# Altium PCB RF-UNIT-QRP-7W.PcbDoc (part 3 of 4)
Units mm, origin at the board's own origin, x right, y up, seen from the top; angles counter-clockwise.
Board outline 187 x 77 mm, 2 copper layers (Top Layer, Top, Bottom Layer, Bottom); 244 components, 167 nets, 747 pads, 3684 vias.
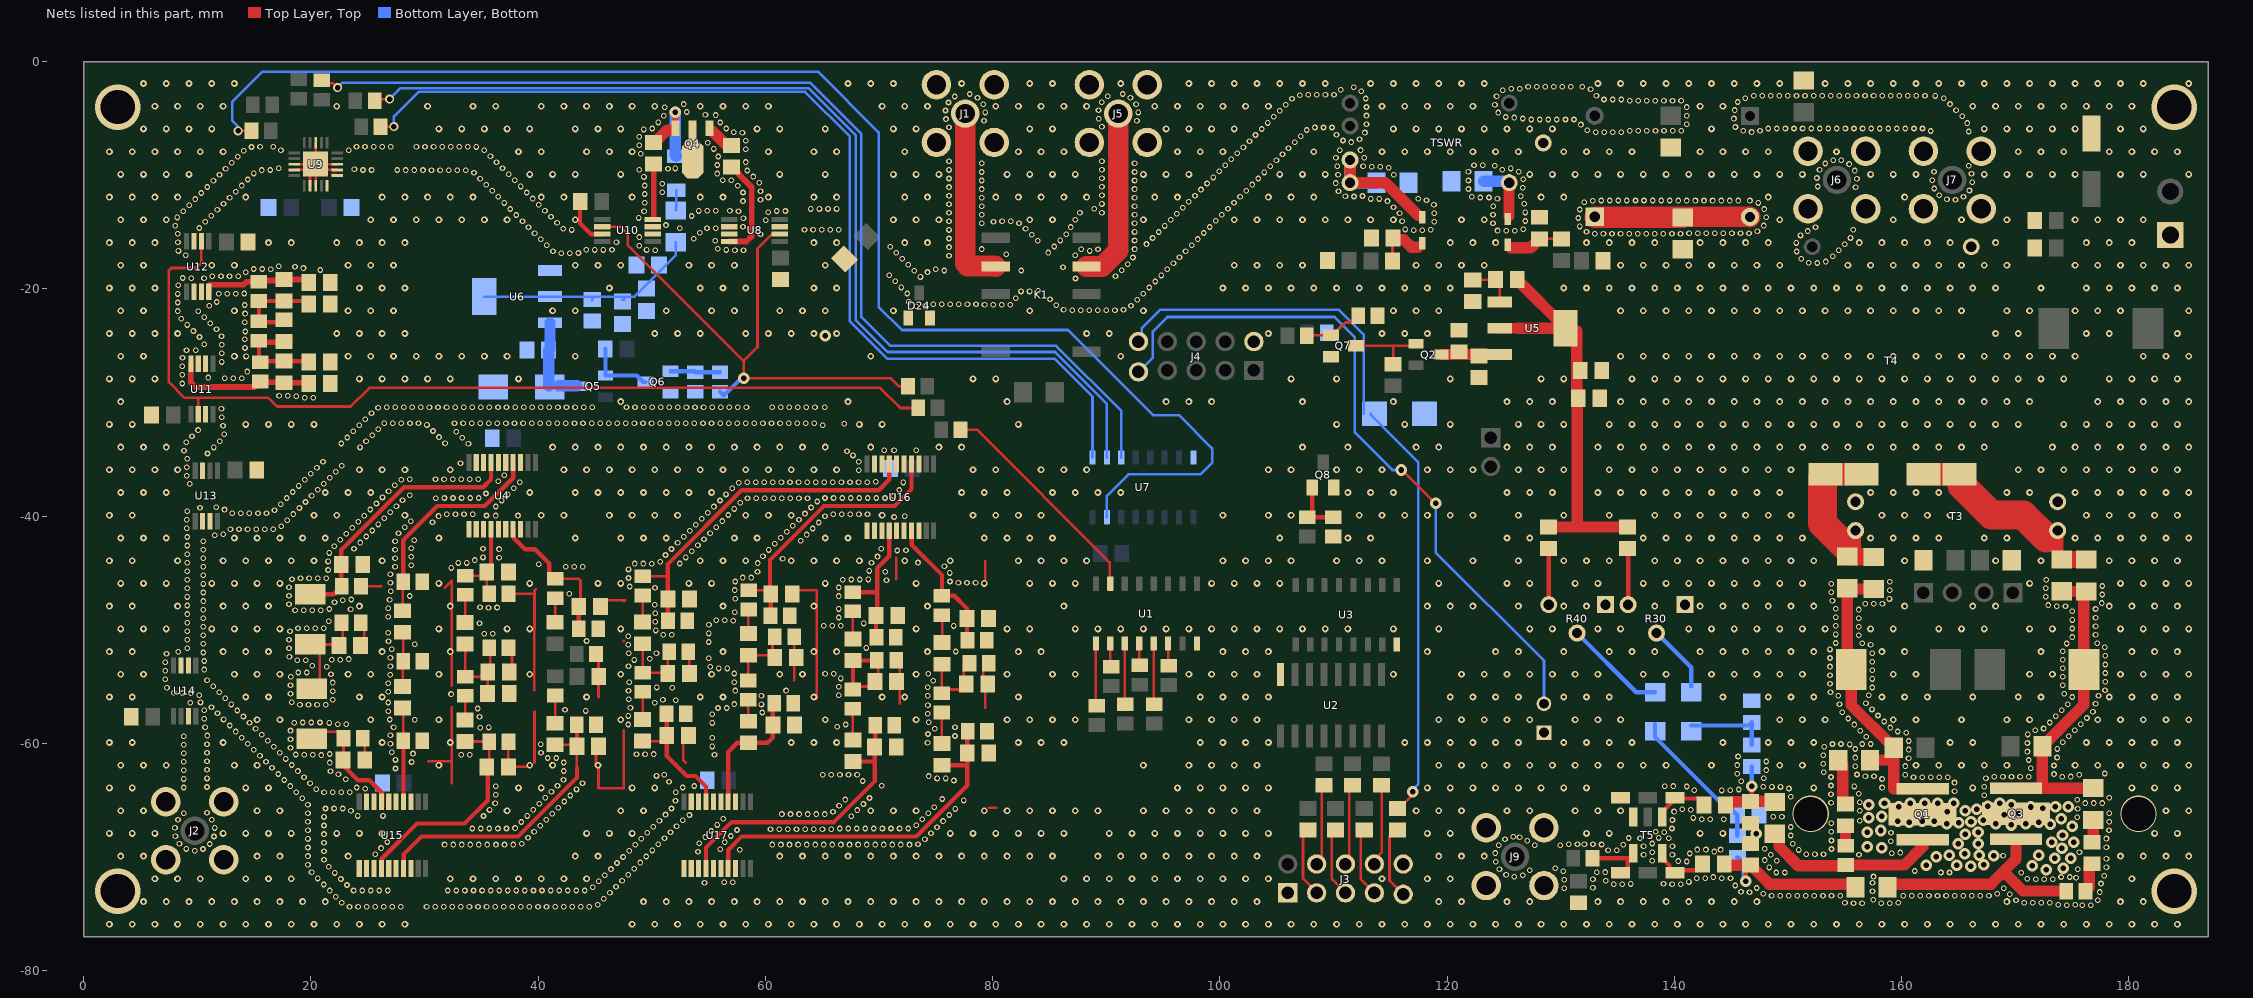
[diagram p3: the nets of this part, all layers, seen from the top]

## Via types
v1: diameter 0.5, hole 0.3, Top Layer, Top to Bottom Layer, Bottom, tented both sides, 1961 vias
v2: diameter 0.6, hole 0.3, Top Layer, Top to Bottom Layer, Bottom, tented both sides, 1584 vias
v3: diameter 1.016, hole 0.486, Top Layer, Top to Bottom Layer, Bottom, tented both sides, 127 vias
v4: diameter 0.8, hole 0.486, Top Layer, Top to Bottom Layer, Bottom, tented both sides, 6 vias
v5: diameter 4, hole 3, Top Layer, Top to Bottom Layer, Bottom, 4 vias
v6: diameter 3.2, hole 3, Top Layer, Top to Bottom Layer, Bottom, 2 vias

## Nets (pads, with @x,y where several pads share a name; then routed paths per layer and width w, separated by ;. In a path a pad name is that pad's centre, name@x,y a point inside that pad or via, vN(x,y) a via of type N, cw(c..) or ccw(c..) an arc to the next point about the centre after c; other vN are vias at no path point) (continued)
GND: (continued)
  other v2: 2.271,-75.923 4.271,-75.923 6.271,-75.923 8.271,-75.923 10.271,-75.923 12.271,-75.923 14.271,-75.923 16.271,-75.923 18.271,-75.923 20.271,-75.923 22.271,-75.923 24.271,-75.923 26.271,-75.923 28.271,-75.923 48.271,-75.923 50.271,-75.923 52.271,-75.923 54.271,-75.923 56.271,-75.923 58.271,-75.923 60.271,-75.923 62.271,-75.923 64.271,-75.923 66.271,-75.923 68.271,-75.923 70.271,-75.923 72.271,-75.923 74.271,-75.923 76.271,-75.923 78.271,-75.923 80.271,-75.923 82.271,-75.923 84.271,-75.923 86.271,-75.923 88.271,-75.923 90.271,-75.923 92.271,-75.923 94.271,-75.923 96.271,-75.923 98.271,-75.923 100.271,-75.923 102.271,-75.923 104.271,-75.923 106.271,-75.923 108.271,-75.923 110.271,-75.923 112.271,-75.923 114.271,-75.923 116.271,-75.923 118.271,-75.923 120.271,-75.923 122.271,-75.923 124.271,-75.923 126.271,-75.923 128.271,-75.923 130.271,-75.923 132.271,-75.923 134.271,-75.923 136.271,-75.923 138.271,-75.923 140.271,-75.923 142.271,-75.923 144.271,-75.923 146.271,-75.923 148.271,-75.923 150.271,-75.923 152.271,-75.923 154.271,-75.923 156.271,-75.923 158.271,-75.923 160.271,-75.923 162.271,-75.923 164.271,-75.923 166.271,-75.923 168.271,-75.923 170.271,-75.923 172.271,-75.923 174.271,-75.923 176.271,-75.923 178.271,-75.923 180.271,-75.923 182.271,-75.923 184.271,-75.923 5.271,-73.923 7.271,-73.923 9.271,-73.923 11.271,-73.923 13.271,-73.923 15.271,-73.923 17.271,-73.923 19.271,-73.923 21.271,-73.923 49.271,-73.923 51.271,-73.923 53.271,-73.923 55.271,-73.923 57.271,-73.923 59.271,-73.923 61.271,-73.923 63.271,-73.923 65.271,-73.923 67.271,-73.923 69.271,-73.923 71.271,-73.923 73.271,-73.923 75.271,-73.923 77.271,-73.923 79.271,-73.923 81.271,-73.923 83.271,-73.923 85.271,-73.923 87.271,-73.923 89.271,-73.923 91.271,-73.923 93.271,-73.923 95.271,-73.923 97.271,-73.923 99.271,-73.923 101.271,-73.923 103.271,-73.923 119.271,-73.923 121.271,-73.923 125.271,-73.923 127.271,-73.923 133.271,-73.923 135.271,-73.923 137.271,-73.923 139.271,-73.923 141.271,-73.923 143.271,-73.923 145.271,-73.923 147.271,-73.923 169.271,-73.923 179.271,-73.923 181.271,-73.923 6.271,-71.923 8.271,-71.923 10.271,-71.923 14.271,-71.923 16.271,-71.923 18.271,-71.923 32.271,-71.923 34.271,-71.923 36.271,-71.923 38.271,-71.923 40.271,-71.923 42.271,-71.923 44.271,-71.923 86.271,-71.923 88.271,-71.923 90.271,-71.923 92.271,-71.923 94.271,-71.923 96.271,-71.923 98.271,-71.923 100.271,-71.923 102.271,-71.923 104.271,-71.923 114.271,-71.923 118.271,-71.923 120.271,-71.923 180.271,-71.923 3.271,-69.923 5.271,-69.923 15.271,-69.923 17.271,-69.923 23.271,-69.923 43.271,-69.923 45.271,-69.923 61.271,-69.923 63.271,-69.923 65.271,-69.923 67.271,-69.923 69.271,-69.923 71.271,-69.923 73.271,-69.923 75.271,-69.923 77.271,-69.923 79.271,-69.923 81.271,-69.923 83.271,-69.923 85.271,-69.923 89.271,-69.923 91.271,-69.923 93.271,-69.923 95.271,-69.923 97.271,-69.923 99.271,-69.923 101.271,-69.923 103.271,-69.923 119.271,-69.923 121.271,-69.923 123.271,-69.923 179.271,-69.923 181.271,-69.923 183.271,-69.923 185.271,-69.923 2.271,-67.923 4.271,-67.923 6.271,-67.923 12.271,-67.923 14.271,-67.923 16.271,-67.923 18.271,-67.923 22.271,-67.923 24.271,-67.923 26.271,-67.923 44.271,-67.923 46.271,-67.923 48.271,-67.923 76.271,-67.923 78.271,-67.923 80.271,-67.923 82.271,-67.923 84.271,-67.923 86.271,-67.923 90.271,-67.923 92.271,-67.923 94.271,-67.923 96.271,-67.923 98.271,-67.923 100.271,-67.923 102.271,-67.923 104.271,-67.923 118.271,-67.923 120.271,-67.923 132.271,-67.923 134.271,-67.923 142.271,-67.923 144.271,-67.923 182.271,-67.923 184.271,-67.923 3.271,-65.923 5.271,-65.923 15.271,-65.923 17.271,-65.923 37.271,-65.923 47.271,-65.923 49.271,-65.923 69.271,-65.923 71.271,-65.923 73.271,-65.923 79.271,-65.923 81.271,-65.923 83.271,-65.923 85.271,-65.923 87.271,-65.923 89.271,-65.923 93.271,-65.923 95.271,-65.923 97.271,-65.923 99.271,-65.923 101.271,-65.923 103.271,-65.923 117.271,-65.923 119.271,-65.923 121.271,-65.923 125.271,-65.923 127.271,-65.923 131.271,-65.923 133.271,-65.923 135.271,-65.923 183.271,-65.923 185.271,-65.923 2.271,-63.923 4.271,-63.923 14.271,-63.923 16.271,-63.923 38.271,-63.923 40.271,-63.923 48.271,-63.923 50.271,-63.923 96.271,-63.923 98.271,-63.923 100.271,-63.923 102.271,-63.923 104.271,-63.923 118.271,-63.923 120.271,-63.923 122.271,-63.923 124.271,-63.923 126.271,-63.923 128.271,-63.923 130.271,-63.923 132.271,-63.923 152.271,-63.923 166.271,-63.923 180.271,-63.923 182.271,-63.923 184.271,-63.923 3.271,-61.923 5.271,-61.923 7.271,-61.923 13.271,-61.923 15.271,-61.923 31.271,-61.923 39.271,-61.923 41.271,-61.923 45.271,-61.923 93.271,-61.923 97.271,-61.923 99.271,-61.923 101.271,-61.923 103.271,-61.923 119.271,-61.923 121.271,-61.923 123.271,-61.923 125.271,-61.923 127.271,-61.923 129.271,-61.923 131.271,-61.923 133.271,-61.923 135.271,-61.923 137.271,-61.923 139.271,-61.923 143.271,-61.923 149.271,-61.923 151.271,-61.923 161.271,-61.923 163.271,-61.923 165.271,-61.923 167.271,-61.923 169.271,-61.923 175.271,-61.923 177.271,-61.923 179.271,-61.923 181.271,-61.923 183.271,-61.923 185.271,-61.923 2.271,-59.923 4.271,-59.923 12.271,-59.923 26.271,-59.923 32.271,-59.923 62.271,-59.923 64.271,-59.923 66.271,-59.923 82.271,-59.923 84.271,-59.923 86.271,-59.923 98.271,-59.923 100.271,-59.923 102.271,-59.923 104.271,-59.923 116.271,-59.923 118.271,-59.923 120.271,-59.923 122.271,-59.923 124.271,-59.923 126.271,-59.923 130.271,-59.923 132.271,-59.923 134.271,-59.923 136.271,-59.923 144.271,-59.923 148.271,-59.923 150.271,-59.923 152.271,-59.923 164.271,-59.923 166.271,-59.923 176.271,-59.923 178.271,-59.923 180.271,-59.923 182.271,-59.923 184.271,-59.923 15.271,-57.923 17.271,-57.923 25.271,-57.923 31.271,-57.923 47.271,-57.923 65.271,-57.923 73.271,-57.923 81.271,-57.923 83.271,-57.923 85.271,-57.923 87.271,-57.923 97.271,-57.923 99.271,-57.923 101.271,-57.923 103.271,-57.923 119.271,-57.923 121.271,-57.923 123.271,-57.923 125.271,-57.923 127.271,-57.923 131.271,-57.923 133.271,-57.923 135.271,-57.923 149.271,-57.923 151.271,-57.923 153.271,-57.923 159.271,-57.923 161.271,-57.923 165.271,-57.923 169.271,-57.923 171.271,-57.923 177.271,-57.923 179.271,-57.923 181.271,-57.923 183.271,-57.923 185.271,-57.923 2.271,-55.923 4.271,-55.923 14.271,-55.923 16.271,-55.923 24.271,-55.923 26.271,-55.923 44.271,-55.923 54.271,-55.923 56.271,-55.923 64.271,-55.923 70.271,-55.923 72.271,-55.923 82.271,-55.923 98.271,-55.923 100.271,-55.923 102.271,-55.923 104.271,-55.923 120.271,-55.923 122.271,-55.923 124.271,-55.923 126.271,-55.923 130.271,-55.923 132.271,-55.923 134.271,-55.923 144.271,-55.923 148.271,-55.923 150.271,-55.923 152.271,-55.923 158.271,-55.923 160.271,-55.923 162.271,-55.923 166.271,-55.923 170.271,-55.923 172.271,-55.923 178.271,-55.923 180.271,-55.923 182.271,-55.923 184.271,-55.923 3.271,-53.923 5.271,-53.923 13.271,-53.923 15.271,-53.923 17.271,-53.923 23.271,-53.923 25.271,-53.923 31.271,-53.923 39.271,-53.923 47.271,-53.923 55.271,-53.923 61.271,-53.923 63.271,-53.923 73.271,-53.923 81.271,-53.923 85.271,-53.923 87.271,-53.923 97.271,-53.923 99.271,-53.923 101.271,-53.923 103.271,-53.923 115.271,-53.923 121.271,-53.923 123.271,-53.923 125.271,-53.923 127.271,-53.923 129.271,-53.923 131.271,-53.923 133.271,-53.923 137.271,-53.923 139.271,-53.923 143.271,-53.923 145.271,-53.923 147.271,-53.923 149.271,-53.923 151.271,-53.923 159.271,-53.923 161.271,-53.923 171.271,-53.923 173.271,-53.923 179.271,-53.923 181.271,-53.923 183.271,-53.923 185.271,-53.923 2.271,-51.923 4.271,-51.923 12.271,-51.923 14.271,-51.923 16.271,-51.923 26.271,-51.923 32.271,-51.923 56.271,-51.923 64.271,-51.923 66.271,-51.923 74.271,-51.923 82.271,-51.923 84.271,-51.923 100.271,-51.923 102.271,-51.923 104.271,-51.923 118.271,-51.923 124.271,-51.923 126.271,-51.923 130.271,-51.923 134.271,-51.923 136.271,-51.923 138.271,-51.923 142.271,-51.923 144.271,-51.923 146.271,-51.923 148.271,-51.923 150.271,-51.923 152.271,-51.923 158.271,-51.923 160.271,-51.923 172.271,-51.923 180.271,-51.923 182.271,-51.923 184.271,-51.923 3.271,-49.923 5.271,-49.923 7.271,-49.923 11.271,-49.923 13.271,-49.923 15.271,-49.923 17.271,-49.923 31.271,-49.923 37.271,-49.923 39.271,-49.923 47.271,-49.923 73.271,-49.923 81.271,-49.923 83.271,-49.923 87.271,-49.923 89.271,-49.923 91.271,-49.923 93.271,-49.923 95.271,-49.923 97.271,-49.923 99.271,-49.923 101.271,-49.923 103.271,-49.923 105.271,-49.923 107.271,-49.923 109.271,-49.923 111.271,-49.923 115.271,-49.923 119.271,-49.923 127.271,-49.923 129.271,-49.923 133.271,-49.923 135.271,-49.923 141.271,-49.923 143.271,-49.923 145.271,-49.923 147.271,-49.923 149.271,-49.923 151.271,-49.923 153.271,-49.923 157.271,-49.923 159.271,-49.923 163.271,-49.923 165.271,-49.923 167.271,-49.923 171.271,-49.923 173.271,-49.923 179.271,-49.923 181.271,-49.923 183.271,-49.923 185.271,-49.923 2.271,-47.923 4.271,-47.923 8.271,-47.923 12.271,-47.923 14.271,-47.923 16.271,-47.923 24.271,-47.923 32.271,-47.923 56.271,-47.923 64.271,-47.923 74.271,-47.923 86.271,-47.923 118.271,-47.923 120.271,-47.923 122.271,-47.923 126.271,-47.923 130.271,-47.923 132.271,-47.923 138.271,-47.923 142.271,-47.923 144.271,-47.923 146.271,-47.923 148.271,-47.923 150.271,-47.923 152.271,-47.923 160.271,-47.923 166.271,-47.923 168.271,-47.923 178.271,-47.923 180.271,-47.923 182.271,-47.923 184.271,-47.923 3.271,-45.923 5.271,-45.923 7.271,-45.923 11.271,-45.923 13.271,-45.923 15.271,-45.923 17.271,-45.923 31.271,-45.923 39.271,-45.923 45.271,-45.923 47.271,-45.923 53.271,-45.923 55.271,-45.923 65.271,-45.923 73.271,-45.923 79.271,-45.923 83.271,-45.923 85.271,-45.923 87.271,-45.923 99.271,-45.923 101.271,-45.923 103.271,-45.923 105.271,-45.923 119.271,-45.923 125.271,-45.923 127.271,-45.923 131.271,-45.923 133.271,-45.923 137.271,-45.923 139.271,-45.923 141.271,-45.923 143.271,-45.923 145.271,-45.923 147.271,-45.923 149.271,-45.923 151.271,-45.923 171.271,-45.923 179.271,-45.923 181.271,-45.923 183.271,-45.923 185.271,-45.923 2.271,-43.923 4.271,-43.923 8.271,-43.923 12.271,-43.923 14.271,-43.923 16.271,-43.923 18.271,-43.923 20.271,-43.923 26.271,-43.923 54.271,-43.923 56.271,-43.923 58.271,-43.923 62.271,-43.923 64.271,-43.923 66.271,-43.923 68.271,-43.923 72.271,-43.923 76.271,-43.923 82.271,-43.923 84.271,-43.923 86.271,-43.923 88.271,-43.923 100.271,-43.923 102.271,-43.923 104.271,-43.923 106.271,-43.923 110.271,-43.923 112.271,-43.923 114.271,-43.923 118.271,-43.923 122.271,-43.923 126.271,-43.923 130.271,-43.923 132.271,-43.923 134.271,-43.923 138.271,-43.923 140.271,-43.923 142.271,-43.923 144.271,-43.923 146.271,-43.923 148.271,-43.923 150.271,-43.923 152.271,-43.923 160.271,-43.923 168.271,-43.923 172.271,-43.923 178.271,-43.923 180.271,-43.923 182.271,-43.923 184.271,-43.923 3.271,-41.923 5.271,-41.923 7.271,-41.923 13.271,-41.923 15.271,-41.923 17.271,-41.923 19.271,-41.923 21.271,-41.923 31.271,-41.923 43.271,-41.923 47.271,-41.923 49.271,-41.923 51.271,-41.923 57.271,-41.923 59.271,-41.923 65.271,-41.923 67.271,-41.923 79.271,-41.923 81.271,-41.923 83.271,-41.923 85.271,-41.923 105.271,-41.923 111.271,-41.923 113.271,-41.923 125.271,-41.923 127.271,-41.923 137.271,-41.923 139.271,-41.923 141.271,-41.923 143.271,-41.923 145.271,-41.923 147.271,-41.923 149.271,-41.923 151.271,-41.923 157.271,-41.923 159.271,-41.923 161.271,-41.923 163.271,-41.923 167.271,-41.923 169.271,-41.923 175.271,-41.923 177.271,-41.923 179.271,-41.923 181.271,-41.923 183.271,-41.923 185.271,-41.923 2.271,-39.923 4.271,-39.923 20.271,-39.923 22.271,-39.923 28.271,-39.923 40.271,-39.923 42.271,-39.923 46.271,-39.923 48.271,-39.923 50.271,-39.923 52.271,-39.923 58.271,-39.923 60.271,-39.923 62.271,-39.923 70.271,-39.923 78.271,-39.923 80.271,-39.923 82.271,-39.923 84.271,-39.923 100.271,-39.923 104.271,-39.923 106.271,-39.923 112.271,-39.923 114.271,-39.923 116.271,-39.923 118.271,-39.923 120.271,-39.923 122.271,-39.923 126.271,-39.923 130.271,-39.923 134.271,-39.923 138.271,-39.923 140.271,-39.923 142.271,-39.923 144.271,-39.923 146.271,-39.923 148.271,-39.923 150.271,-39.923 158.271,-39.923 160.271,-39.923 162.271,-39.923 164.271,-39.923 176.271,-39.923 178.271,-39.923 180.271,-39.923 182.271,-39.923 184.271,-39.923 3.271,-37.923 5.271,-37.923 7.271,-37.923 21.271,-37.923 23.271,-37.923 25.271,-37.923 39.271,-37.923 43.271,-37.923 45.271,-37.923 47.271,-37.923 49.271,-37.923 51.271,-37.923 53.271,-37.923 55.271,-37.923 77.271,-37.923 79.271,-37.923 81.271,-37.923 85.271,-37.923 87.271,-37.923 89.271,-37.923 91.271,-37.923 111.271,-37.923 113.271,-37.923 115.271,-37.923 125.271,-37.923 127.271,-37.923 129.271,-37.923 133.271,-37.923 135.271,-37.923 137.271,-37.923 139.271,-37.923 141.271,-37.923 143.271,-37.923 145.271,-37.923 147.271,-37.923 149.271,-37.923 157.271,-37.923 159.271,-37.923 161.271,-37.923 163.271,-37.923 169.271,-37.923 171.271,-37.923 175.271,-37.923 177.271,-37.923 179.271,-37.923 181.271,-37.923 183.271,-37.923 185.271,-37.923 2.271,-35.923 4.271,-35.923 6.271,-35.923 8.271,-35.923 24.271,-35.923 26.271,-35.923 28.271,-35.923 32.271,-35.923 42.271,-35.923 44.271,-35.923 46.271,-35.923 48.271,-35.923 50.271,-35.923 52.271,-35.923 54.271,-35.923 56.271,-35.923 58.271,-35.923 60.271,-35.923 62.271,-35.923 64.271,-35.923 66.271,-35.923 78.271,-35.923 80.271,-35.923 84.271,-35.923 86.271,-35.923 88.271,-35.923 104.271,-35.923 106.271,-35.923 110.271,-35.923 112.271,-35.923 114.271,-35.923 118.271,-35.923 120.271,-35.923 122.271,-35.923 126.271,-35.923 128.271,-35.923 130.271,-35.923 134.271,-35.923 136.271,-35.923 138.271,-35.923 140.271,-35.923 142.271,-35.923 144.271,-35.923 146.271,-35.923 148.271,-35.923 150.271,-35.923 170.271,-35.923 172.271,-35.923 174.271,-35.923 176.271,-35.923 178.271,-35.923 180.271,-35.923 182.271,-35.923 184.271,-35.923 3.271,-33.923 5.271,-33.923 7.271,-33.923 41.271,-33.923 43.271,-33.923 45.271,-33.923 47.271,-33.923 49.271,-33.923 51.271,-33.923 53.271,-33.923 55.271,-33.923 57.271,-33.923 59.271,-33.923 61.271,-33.923 63.271,-33.923 65.271,-33.923 69.271,-33.923 75.271,-33.923 77.271,-33.923 107.271,-33.923 111.271,-33.923 117.271,-33.923 119.271,-33.923 125.271,-33.923 127.271,-33.923 129.271,-33.923 133.271,-33.923 135.271,-33.923 137.271,-33.923 139.271,-33.923 141.271,-33.923 143.271,-33.923 145.271,-33.923 147.271,-33.923 149.271,-33.923 151.271,-33.923 153.271,-33.923 155.271,-33.923 157.271,-33.923 159.271,-33.923 161.271,-33.923 163.271,-33.923 165.271,-33.923 167.271,-33.923 173.271,-33.923 175.271,-33.923 177.271,-33.923 179.271,-33.923 181.271,-33.923 183.271,-33.923 185.271,-33.923 2.271,-31.923 4.271,-31.923 14.271,-31.923 16.271,-31.923 18.271,-31.923 20.271,-31.923 68.271,-31.923 70.271,-31.923 82.271,-31.923 110.271,-31.923 116.271,-31.923 120.271,-31.923 126.271,-31.923 128.271,-31.923 130.271,-31.923 134.271,-31.923 136.271,-31.923 138.271,-31.923 140.271,-31.923 142.271,-31.923 144.271,-31.923 146.271,-31.923 148.271,-31.923 150.271,-31.923 152.271,-31.923 154.271,-31.923 156.271,-31.923 158.271,-31.923 160.271,-31.923 162.271,-31.923 164.271,-31.923 166.271,-31.923 168.271,-31.923 170.271,-31.923 174.271,-31.923 176.271,-31.923 178.271,-31.923 180.271,-31.923 182.271,-31.923 184.271,-31.923 3.271,-29.923 47.271,-29.923 67.271,-29.923 81.271,-29.923 95.271,-29.923 97.271,-29.923 99.271,-29.923 107.271,-29.923 115.271,-29.923 125.271,-29.923 127.271,-29.923 129.271,-29.923 135.271,-29.923 137.271,-29.923 139.271,-29.923 141.271,-29.923 143.271,-29.923 145.271,-29.923 147.271,-29.923 149.271,-29.923 151.271,-29.923 153.271,-29.923 155.271,-29.923 157.271,-29.923 159.271,-29.923 161.271,-29.923 163.271,-29.923 165.271,-29.923 167.271,-29.923 169.271,-29.923 171.271,-29.923 177.271,-29.923 179.271,-29.923 181.271,-29.923 183.271,-29.923 185.271,-29.923 2.271,-27.923 4.271,-27.923 6.271,-27.923 24.271,-27.923 26.271,-27.923 28.271,-27.923 30.271,-27.923 32.271,-27.923 38.271,-27.923 78.271,-27.923 80.271,-27.923 106.271,-27.923 110.271,-27.923 120.271,-27.923 128.271,-27.923 130.271,-27.923 136.271,-27.923 138.271,-27.923 140.271,-27.923 142.271,-27.923 144.271,-27.923 146.271,-27.923 148.271,-27.923 150.271,-27.923 152.271,-27.923 154.271,-27.923 156.271,-27.923 158.271,-27.923 160.271,-27.923 162.271,-27.923 164.271,-27.923 166.271,-27.923 168.271,-27.923 170.271,-27.923 172.271,-27.923 174.271,-27.923 178.271,-27.923 180.271,-27.923 182.271,-27.923 184.271,-27.923 3.271,-25.923 5.271,-25.923 13.271,-25.923 23.271,-25.923 25.271,-25.923 27.271,-25.923 29.271,-25.923 31.271,-25.923 33.271,-25.923 35.271,-25.923 37.271,-25.923 43.271,-25.923 69.271,-25.923 91.271,-25.923 135.271,-25.923 137.271,-25.923 139.271,-25.923 141.271,-25.923 143.271,-25.923 145.271,-25.923 147.271,-25.923 149.271,-25.923 151.271,-25.923 153.271,-25.923 155.271,-25.923 157.271,-25.923 159.271,-25.923 161.271,-25.923 163.271,-25.923 165.271,-25.923 167.271,-25.923 169.271,-25.923 171.271,-25.923 173.271,-25.923 175.271,-25.923 181.271,-25.923 183.271,-25.923 185.271,-25.923 2.271,-23.923 4.271,-23.923 6.271,-23.923 8.271,-23.923 22.271,-23.923 24.271,-23.923 26.271,-23.923 28.271,-23.923 50.271,-23.923 52.271,-23.923 54.271,-23.923 58.271,-23.923 60.271,-23.923 62.271,-23.923 64.271,-23.923 66.271,-23.923 88.271,-23.923 90.271,-23.923 104.271,-23.923 114.271,-23.923 116.271,-23.923 118.271,-23.923 168.271,-23.923 170.271,-23.923 176.271,-23.923 178.271,-23.923 184.271,-23.923 3.271,-21.923 5.271,-21.923 13.271,-21.923 23.271,-21.923 25.271,-21.923 27.271,-21.923 41.271,-21.923 43.271,-21.923 51.271,-21.923 55.271,-21.923 57.271,-21.923 61.271,-21.923 63.271,-21.923 65.271,-21.923 71.271,-21.923 83.271,-21.923 93.271,-21.923 115.271,-21.923 117.271,-21.923 119.271,-21.923 135.271,-21.923 137.271,-21.923 139.271,-21.923 141.271,-21.923 143.271,-21.923 145.271,-21.923 147.271,-21.923 149.271,-21.923 151.271,-21.923 153.271,-21.923 155.271,-21.923 157.271,-21.923 159.271,-21.923 161.271,-21.923 163.271,-21.923 165.271,-21.923 169.271,-21.923 171.271,-21.923 175.271,-21.923 177.271,-21.923 179.271,-21.923 185.271,-21.923 2.271,-19.923 4.271,-19.923 6.271,-19.923 24.271,-19.923 26.271,-19.923 28.271,-19.923 46.271,-19.923 54.271,-19.923 56.271,-19.923 58.271,-19.923 64.271,-19.923 66.271,-19.923 100.271,-19.923 102.271,-19.923 104.271,-19.923 106.271,-19.923 108.271,-19.923 110.271,-19.923 112.271,-19.923 114.271,-19.923 116.271,-19.923 118.271,-19.923 120.271,-19.923 130.271,-19.923 132.271,-19.923 134.271,-19.923 136.271,-19.923 138.271,-19.923 140.271,-19.923 142.271,-19.923 144.271,-19.923 146.271,-19.923 148.271,-19.923 150.271,-19.923 152.271,-19.923 154.271,-19.923 156.271,-19.923 158.271,-19.923 160.271,-19.923 162.271,-19.923 164.271,-19.923 166.271,-19.923 168.271,-19.923 172.271,-19.923 176.271,-19.923 178.271,-19.923 180.271,-19.923 182.271,-19.923 184.271,-19.923 3.271,-17.923 5.271,-17.923 11.271,-17.923 13.271,-17.923 23.271,-17.923 25.271,-17.923 27.271,-17.923 43.271,-17.923 45.271,-17.923 47.271,-17.923 53.271,-17.923 55.271,-17.923 57.271,-17.923 65.271,-17.923 101.271,-17.923 103.271,-17.923 105.271,-17.923 107.271,-17.923 117.271,-17.923 119.271,-17.923 121.271,-17.923 123.271,-17.923 135.271,-17.923 137.271,-17.923 139.271,-17.923 141.271,-17.923 143.271,-17.923 145.271,-17.923 147.271,-17.923 149.271,-17.923 155.271,-17.923 157.271,-17.923 159.271,-17.923 161.271,-17.923 163.271,-17.923 165.271,-17.923 167.271,-17.923 169.271,-17.923 175.271,-17.923 177.271,-17.923 179.271,-17.923 181.271,-17.923 183.271,-17.923 185.271,-17.923 2.271,-15.923 4.271,-15.923 6.271,-15.923 16.271,-15.923 18.271,-15.923 22.271,-15.923 24.271,-15.923 26.271,-15.923 28.271,-15.923 64.271,-15.923 66.271,-15.923 72.271,-15.923 74.271,-15.923 120.271,-15.923 122.271,-15.923 124.271,-15.923 132.271,-15.923 134.271,-15.923 136.271,-15.923 138.271,-15.923 142.271,-15.923 144.271,-15.923 146.271,-15.923 148.271,-15.923 156.271,-15.923 158.271,-15.923 160.271,-15.923 162.271,-15.923 164.271,-15.923 168.271,-15.923 176.271,-15.923 178.271,-15.923 180.271,-15.923 3.271,-13.923 5.271,-13.923 7.271,-13.923 25.271,-13.923 27.271,-13.923 29.271,-13.923 31.271,-13.923 33.271,-13.923 35.271,-13.923 37.271,-13.923 43.271,-13.923 71.271,-13.923 73.271,-13.923 75.271,-13.923 83.271,-13.923 85.271,-13.923 93.271,-13.923 101.271,-13.923 103.271,-13.923 105.271,-13.923 107.271,-13.923 109.271,-13.923 111.271,-13.923 113.271,-13.923 115.271,-13.923 121.271,-13.923 123.271,-13.923 149.271,-13.923 159.271,-13.923 165.271,-13.923 169.271,-13.923 175.271,-13.923 177.271,-13.923 179.271,-13.923 181.271,-13.923 2.271,-11.923 4.271,-11.923 6.271,-11.923 8.271,-11.923 14.271,-11.923 26.271,-11.923 28.271,-11.923 30.271,-11.923 32.271,-11.923 34.271,-11.923 40.271,-11.923 42.271,-11.923 48.271,-11.923 54.271,-11.923 56.271,-11.923 60.271,-11.923 64.271,-11.923 66.271,-11.923 72.271,-11.923 74.271,-11.923 80.271,-11.923 82.271,-11.923 84.271,-11.923 86.271,-11.923 88.271,-11.923 94.271,-11.923 96.271,-11.923 104.271,-11.923 106.271,-11.923 108.271,-11.923 128.271,-11.923 130.271,-11.923 148.271,-11.923 160.271,-11.923 3.271,-9.923 5.271,-9.923 7.271,-9.923 9.271,-9.923 39.271,-9.923 41.271,-9.923 43.271,-9.923 47.271,-9.923 61.271,-9.923 65.271,-9.923 71.271,-9.923 73.271,-9.923 75.271,-9.923 81.271,-9.923 83.271,-9.923 85.271,-9.923 87.271,-9.923 93.271,-9.923 95.271,-9.923 97.271,-9.923 105.271,-9.923 107.271,-9.923 109.271,-9.923 127.271,-9.923 129.271,-9.923 131.271,-9.923 133.271,-9.923 135.271,-9.923 137.271,-9.923 139.271,-9.923 141.271,-9.923 143.271,-9.923 145.271,-9.923 147.271,-9.923 149.271,-9.923 151.271,-9.923 157.271,-9.923 159.271,-9.923 161.271,-9.923 167.271,-9.923 169.271,-9.923 171.271,-9.923 173.271,-9.923 175.271,-9.923 179.271,-9.923 181.271,-9.923 185.271,-9.923 2.271,-7.923 4.271,-7.923 6.271,-7.923 8.271,-7.923 10.271,-7.923 12.271,-7.923 38.271,-7.923 40.271,-7.923 44.271,-7.923 46.271,-7.923 48.271,-7.923 60.271,-7.923 64.271,-7.923 66.271,-7.923 72.271,-7.923 82.271,-7.923 84.271,-7.923 86.271,-7.923 96.271,-7.923 98.271,-7.923 100.271,-7.923 108.271,-7.923 114.271,-7.923 116.271,-7.923 118.271,-7.923 120.271,-7.923 122.271,-7.923 124.271,-7.923 126.271,-7.923 130.271,-7.923 132.271,-7.923 134.271,-7.923 136.271,-7.923 142.271,-7.923 144.271,-7.923 146.271,-7.923 148.271,-7.923 154.271,-7.923 170.271,-7.923 172.271,-7.923 174.271,-7.923 178.271,-7.923 180.271,-7.923 182.271,-7.923 184.271,-7.923 5.271,-5.923 7.271,-5.923 9.271,-5.923 11.271,-5.923 31.271,-5.923 33.271,-5.923 35.271,-5.923 37.271,-5.923 39.271,-5.923 43.271,-5.923 45.271,-5.923 47.271,-5.923 59.271,-5.923 61.271,-5.923 65.271,-5.923 71.271,-5.923 73.271,-5.923 83.271,-5.923 85.271,-5.923 95.271,-5.923 97.271,-5.923 99.271,-5.923 101.271,-5.923 115.271,-5.923 117.271,-5.923 119.271,-5.923 121.271,-5.923 123.271,-5.923 125.271,-5.923 127.271,-5.923 129.271,-5.923 143.271,-5.923 167.271,-5.923 169.271,-5.923 171.271,-5.923 173.271,-5.923 175.271,-5.923 179.271,-5.923 181.271,-5.923 6.271,-3.923 8.271,-3.923 10.271,-3.923 12.271,-3.923 22.271,-3.923 30.271,-3.923 34.271,-3.923 36.271,-3.923 40.271,-3.923 42.271,-3.923 44.271,-3.923 46.271,-3.923 48.271,-3.923 50.271,-3.923 54.271,-3.923 56.271,-3.923 58.271,-3.923 60.271,-3.923 70.271,-3.923 72.271,-3.923 74.271,-3.923 80.271,-3.923 82.271,-3.923 84.271,-3.923 86.271,-3.923 88.271,-3.923 94.271,-3.923 96.271,-3.923 98.271,-3.923 100.271,-3.923 102.271,-3.923 104.271,-3.923 114.271,-3.923 116.271,-3.923 118.271,-3.923 120.271,-3.923 122.271,-3.923 142.271,-3.923 144.271,-3.923 166.271,-3.923 168.271,-3.923 170.271,-3.923 172.271,-3.923 174.271,-3.923 176.271,-3.923 178.271,-3.923 180.271,-3.923 5.271,-1.923 7.271,-1.923 9.271,-1.923 11.271,-1.923 13.271,-1.923 67.271,-1.923 69.271,-1.923 71.271,-1.923 77.271,-1.923 83.271,-1.923 85.271,-1.923 91.271,-1.923 97.271,-1.923 99.271,-1.923 101.271,-1.923 103.271,-1.923 105.271,-1.923 107.271,-1.923 109.271,-1.923 113.271,-1.923 115.271,-1.923 117.271,-1.923 119.271,-1.923 121.271,-1.923 123.271,-1.923 133.271,-1.923 135.271,-1.923 137.271,-1.923 139.271,-1.923 141.271,-1.923 143.271,-1.923 145.271,-1.923 147.271,-1.923 149.271,-1.923 153.271,-1.923 155.271,-1.923 157.271,-1.923 159.271,-1.923 161.271,-1.923 163.271,-1.923 165.271,-1.923 167.271,-1.923 169.271,-1.923 171.271,-1.923 173.271,-1.923 175.271,-1.923 177.271,-1.923 179.271,-1.923 181.271,-1.923 185.271,-1.923
  other v3: 172.72,-71.12 174.244,-70.993 166.074,-70.824 171.514,-70.751 162.179,-70.739 164.846,-70.739 167.235,-70.679 173.482,-70.104 174.879,-70.104 163.068,-69.977 168.105,-69.881 164.211,-69.85 166.836,-69.845 172.085,-69.85 165.566,-69.7 158.239,-69.192 174.117,-69.215 156.972,-69.088 164.973,-68.834 166.751,-68.834 173.228,-68.707 175.133,-68.707 174.162,-68.067 165.602,-67.995 147.193,-67.945 156.972,-67.818 166.727,-67.814 158.167,-67.669 175.006,-67.31 169.672,-67.183 173.074,-67.124 163.957,-67.056 168.275,-67.056 170.942,-67.056 165.022,-66.979 160.67,-66.943 166.11,-66.907 172.085,-66.929 162.882,-66.871 159.654,-66.834 161.83,-66.834 167.198,-66.762 174.053,-66.653 157.099,-66.548 158.239,-66.435 169.037,-66.294 170.307,-66.167 164.039,-66.015 165.608,-65.913 166.624,-65.786 172.421,-65.71 171.369,-65.601 159.763,-65.565 173.546,-65.565 174.67,-65.565 167.597,-65.528 157.099,-65.405 169.672,-65.405 158.496,-65.278 160.782,-65.278 162.052,-65.278 163.195,-65.278 164.592,-65.278 168.656,-65.278 65.278,-24.13
  other v5: 3,-73 184,-73 3,-4 184,-4
  other v6: 152,-66.2 180.848,-66.2
LNA_ON: R31.2 R84.1 U8.2 U10.2 | length 49.9
  Top Layer, Top w0.23: U10.2@45.654,-14.534 47.3,-14.534 47.879,-15.113 47.879,-16.129 58.094,-26.344 ; U8.2@61.28,-15.184 61.245,-15.219 60.55,-15.219 59.309,-16.46 59.309,-25.129 58.094,-26.344 ; R84.1@72.556,-28.575 71.755,-28.575 71.062,-27.882 v3(58.094,-27.882) 58.094,-26.344
  Bottom Layer, Bottom w0.381: R31.2@56.007,-29.044 56.344,-29.381 57.843,-27.882 v3(58.094,-27.882)
LPF_ON: R85.1 U11.2 U12.2 | length 84.6
  Top Layer, Top w0.23: U11.2@10.089,-31.054 10.089,-29.647 10.033,-29.591 ; U12.2@10.358,-15.809 10.358,-17.709 9.906,-18.161 7.716,-18.161 7.493,-18.384 7.493,-28.194 8.89,-29.591 10.033,-29.591 ; R85.1@73.445,-30.48 71.882,-30.48 70.104,-28.702 66.725,-28.702 66.719,-28.708 25.14,-28.708 23.495,-30.353 17.018,-30.353 16.256,-29.591 10.033,-29.591
MB_ALC: D2.1 J4.10 R12.2 | length 66.7
  Top Layer, Top w0.23: R12.2@115.63,-65.731 115.73,-65.731 116.845,-64.615 116.845,-64.384 v3(116.967,-64.262)
  Bottom Layer, Bottom w0.23: J4.10@92.837,-24.638 93.118,-24.357 93.118,-23.468 94.742,-21.844 110.49,-21.844 112.649,-24.003 D2.1@112.649,-30.988 ; D2.1@113.284,-30.988 113.284,-31.084 117.475,-35.275 117.475,-63.564 116.967,-64.072 v3(116.967,-64.262)
MB_THERM: J4.9 R13.2 R14.2 | length 64.3
  Top Layer, Top w0.23: v3(115.951,-35.941) 116.014,-35.941 118.935,-38.862 v3(118.999,-38.862)
  Bottom Layer, Bottom w0.23: J4.9@92.837,-27.305 94.107,-26.035 94.107,-23.749 95.377,-22.479 110.109,-22.479 110.807,-23.177 ; R13.2@109.601,-23.876 110.109,-23.876 110.807,-23.177 ; v3(115.951,-35.941) 115.189,-35.941 111.887,-32.639 111.887,-24.257 110.807,-23.177 ; v3(118.999,-38.862) 118.999,-43.18 128.524,-52.705 R14.2@128.524,-56.515
NetC5_1: C5.1 C6.2 L2.2 | length 4.8
  Top Layer, Top w0.23: C6.2@28.07,-54.993 28.07,-52.812 L2.2@28.116,-52.766 28.116,-50.272 C5.1@28.07,-50.226
NetC5_2: C5.2 L1.2 U4.4 | length 19.5
  Top Layer, Top w0.23: C5.2@28.07,-48.326 28.07,-45.827 L1.2@28.116,-45.781
  Top Layer, Top w0.381: L1.2@28.116,-45.781 28.116,-42.115 31.115,-39.116 35.306,-39.116 37.805,-36.617 U4.4@37.805,-35.289
NetC6_1: C6.1 L3.2 U15.4 | length 8.3
  Top Layer, Top w0.23: L3.2@28.07,-59.797 L3.2@28.116,-59.751 28.116,-56.94 C6.1@28.07,-56.893
  Top Layer, Top w0.381: L3.2@28.07,-59.797 28.153,-59.88 U15.4@28.153,-65.134
NetC7_2: C7.2 C11.1 C14.2 L5.2 L8.1 | length 9.2
  Top Layer, Top w0.23: C11.1@33.577,-51.265 L8.1@33.577,-54.123 35.164,-54.123 C14.2@35.565,-53.722 ; C7.2@35.553,-55.626 35.565,-55.614 C14.2@35.565,-53.722 ; L5.2@35.687,-51.583 35.799,-51.695 35.799,-53.488 C14.2@35.565,-53.722
NetC11_2: C11.2 L7.2 | length 2.4
  Top Layer, Top w0.23: C11.2@33.577,-49.365 L7.2@33.577,-46.933
NetC12_1: C12.1 C15.2 L6.2 U15.14 | length 19.7
  Top Layer, Top w0.23: C12.1@33.577,-59.838 L6.2@35.687,-59.838 35.687,-61.86 C15.2@35.487,-62.06
  Top Layer, Top w0.381: U15.14@26.203,-71.01 26.238,-70.975 26.238,-70.155 29.337,-67.056 33.528,-67.056 35.56,-65.024 35.56,-62.133 C15.2@35.487,-62.06
NetC12_2: C12.2 L8.2 | length 2.1
  Top Layer, Top w0.23: C12.2@33.577,-57.938 L8.2@33.577,-55.823
NetC13_2: C13.2 L4.2 L7.1 U4.14 | length 7.9
  Top Layer, Top w0.23: L7.1@33.577,-45.233 35.169,-45.233 C13.2@35.487,-44.915 35.487,-46.62 L4.2@35.687,-46.82
  Top Layer, Top w0.381: C13.2@35.487,-44.915 35.855,-44.547 U4.14@35.855,-41.165
NetC20_2: C20.2 L12.2 | length 2.1
  Top Layer, Top w0.23: C20.2@41.504,-49.335 L12.2@41.504,-47.22
NetC21_1: C21.1 C24.2 L11.2 U15.17 | length 25.9
  Top Layer, Top w0.23: C21.1@41.504,-60.125 43.389,-60.125 43.389,-62.005 43.414,-62.03
  Top Layer, Top w0.381: U15.17@28.153,-71.01 28.188,-70.975 28.188,-69.748 29.736,-68.199 38.227,-68.199 43.414,-63.012 43.414,-62.157 ; L11.2@43.389,-58.347 43.414,-58.372 C24.2@43.414,-60.252
NetC21_2: C21.2 L13.2 | length 2.4
  Top Layer, Top w0.23: C21.2@41.504,-58.225 L13.2@41.504,-55.792
NetC22_2: C22.2 L9.2 L12.1 U4.17 | length 12.4
  Top Layer, Top w0.23: L12.1@41.504,-45.52 43.573,-45.52 43.731,-45.678 43.731,-47.306 C22.2@43.726,-47.311
  Top Layer, Top w0.381: U4.17@37.805,-41.165 37.84,-41.2 37.84,-41.907 38.858,-42.926 39.751,-42.926 40.969,-44.144 40.969,-45.11 41.379,-45.52 L12.1@41.504,-45.52 ; L9.2@43.576,-49.893 43.581,-49.888 C22.2@43.581,-47.943
NetC32_1: C32.1 C35.2 L15.2 L18.1 | length 6.7
  Top Layer, Top w0.23: C32.1@49.192,-51.229 L18.1@49.192,-53.769 51.334,-53.769 C35.2@51.415,-53.85 51.415,-52.058 L15.2@51.527,-51.945
NetC32_2: C32.2 L17.2 | length 2.3
  Top Layer, Top w0.23: C32.2@49.192,-49.329 L17.2@49.192,-46.989
NetC33_1: C33.1 C36.2 L16.2 U17.7 | length 11.5
  Top Layer, Top w0.23: C33.1@49.192,-59.802 C36.2@51.077,-59.802
  Top Layer, Top w0.381: L16.2@51.303,-57.404 51.328,-57.429 C36.2@51.328,-59.309 51.328,-61.107 53.086,-62.865 53.848,-62.865 54.778,-63.795 U17.7@54.778,-65.134
NetC33_2: C33.2 L18.2 | length 2.4
  Top Layer, Top w0.23: C33.2@49.192,-57.902 L18.2@49.192,-55.469
NetC34_2: C34.2 L14.2 L17.1 U16.7 | length 31.1
  Top Layer, Top w0.23: L17.1@49.192,-45.289 51.42,-45.289
  Top Layer, Top w0.381: 51.42,-45.387 C34.2@51.42,-47.292 51.42,-49.182 L14.2@51.435,-49.197 ; 51.42,-45.289 51.42,-44.211 57.912,-37.719 69.977,-37.719 70.907,-36.789 U16.7@70.907,-35.416
NetC38_1: C38.1 R27.2 R34.1 R42.2 | length 6.7
  Top Layer, Top w0.381: C38.1@144.514,-65.659 C38.1@144.526,-65.671 ; R42.2@146.703,-65.127 146.747,-65.084 146.812,-65.018 v3(146.812,-63.754)
  Top Layer, Top w1: C38.1@144.688,-65.575 145.135,-65.127 R42.2@146.703,-65.127 ; R42.2@146.747,-65.084 R34.1@148.077,-65.084
  Bottom Layer, Bottom w0.381: v3(146.812,-63.754) R27.2@146.812,-62.037
NetC38_2: C38.2 T5.1 T5.7 | length 5.1
  Top Layer, Top w0.381: T5.7@138.938,-66.482 138.938,-66.037 139.697,-65.278 139.697,-65.082 140.007,-64.772 T5.1@140.068,-64.772 140.142,-64.845 142.154,-64.845 142.614,-65.305 C38.2@142.614,-65.405
NetC44_1: C44.1 C47.2 L20.2 L23.1 | length 6.5
  Top Layer, Top w0.23: L23.1@58.496,-54.463 C44.1@58.496,-52.24 60.349,-52.24 60.626,-52.517 60.626,-50.817 L20.2@60.831,-50.612
NetC44_2: C44.2 L22.2 | length 2.1
  Top Layer, Top w0.23: C44.2@58.496,-50.34 L22.2@58.496,-48.225
NetC45_1: C45.1 C48.2 L21.2 U17.4 | length 11.9
  Top Layer, Top w0.381: U17.4@56.728,-65.134 56.728,-60.749 57.524,-59.952 C45.1@58.496,-59.952 60.19,-59.952 60.66,-59.482 C48.2@60.66,-58.377 60.66,-56.579 L21.2@60.767,-56.472
NetC45_2: C45.2 L23.2 | length 1.9
  Top Layer, Top w0.23: C45.2@58.496,-58.052 L23.2@58.496,-56.163
NetC46_2: C46.2 L19.2 L22.1 U16.4 | length 23.7
  Top Layer, Top w0.23: L22.1@58.496,-46.525 C46.2@60.381,-46.525
  Top Layer, Top w0.381: C46.2@60.406,-46.525 60.406,-43.861 65.151,-39.116 71.374,-39.116 72.857,-37.633 U16.4@72.857,-35.416 ; L19.2@60.447,-48.768 60.472,-48.743 C46.2@60.472,-46.863
NetC58_1: C58.1 C61.2 L25.2 L28.1 | length 9.3
  Top Layer, Top w0.23: L28.1@67.706,-55.26 67.975,-54.991 69.929,-54.991 69.929,-52.817 L25.2@69.816,-52.705
  Top Layer, Top w0.381: L28.1@67.706,-55.26 C58.1@67.706,-52.705 L25.2@69.816,-52.705
NetC58_2: C58.2 L27.2 | length 2.4
  Top Layer, Top w0.23: C58.2@67.706,-50.805 L27.2@67.706,-48.388
NetC59_1: C59.1 C62.2 L26.2 U17.14 | length 25.9
  Top Layer, Top w0.381: U17.14@54.778,-71.01 54.778,-69.174 57.023,-66.929 66.04,-66.929 69.616,-63.353 69.616,-61.595 ; C59.1@67.706,-61.595 69.616,-61.595 ; L26.2@69.657,-58.42 69.657,-60.284 C62.2@69.616,-60.325 69.616,-61.595
NetC59_2: C59.2 L28.2 | length 2.7
  Top Layer, Top w0.23: C59.2@67.706,-59.695 L28.2@67.706,-56.96
NetC60_2: C60.2 L24.2 L27.1 U16.14 | length 12
  Top Layer, Top w0.381: L27.1@67.706,-46.687 69.766,-46.687 69.85,-46.603 ; L24.2@69.784,-50.641 69.743,-50.6 C60.2@69.743,-48.736 69.85,-48.629 69.85,-46.603 ; U16.14@70.907,-41.292 70.907,-43.52 69.85,-44.577 69.85,-46.603
NetC72_1: C72.1 C75.2 L30.2 L33.1 | length 6.4
  Top Layer, Top w0.23: C72.1@75.563,-53.032 75.54,-53.054 75.54,-55.262 77.445,-55.262 77.445,-54.937 77.445,-53.078 L30.2@77.491,-53.032
NetC72_2: C72.2 L32.2 | length 2.4
  Top Layer, Top w0.23: L32.2@75.54,-48.714 75.563,-48.737 C72.2@75.563,-51.132
NetC73_1: C73.1 C76.2 L31.2 U17.17 | length 32.1
  Top Layer, Top w0.381: U17.17@56.728,-71.01 56.728,-69.383 57.912,-68.199 73.279,-68.199 77.761,-63.717 77.761,-61.976 ; C73.1@75.54,-61.922 77.707,-61.922 77.761,-61.976 ; L31.2@77.802,-58.928 77.761,-58.969 C76.2@77.761,-60.833 77.761,-61.976
NetC73_2: C73.2 L33.2 | length 2.7
  Top Layer, Top w0.23: C73.2@75.54,-60.022 L33.2@75.54,-57.287
NetC74_2: C74.2 L29.2 L32.1 U16.17 | length 12.3
  Top Layer, Top w0.381: U16.17@72.857,-41.292 72.892,-41.327 72.892,-42.539 75.54,-45.187 L32.1@75.54,-47.014 76.628,-47.014 77.744,-48.13 C74.2@77.744,-49.022 77.744,-50.886 L29.2@77.785,-50.927
NetC80_1: C80.1 R38.1 R43.1 R44.2 | length 16.2
  Top Layer, Top w0.381: v3(146.304,-72.136) 146.304,-71.112 R43.1@146.7,-70.716
  Top Layer, Top w1: C80.1@144.456,-70.425 144.747,-70.716 146.304,-70.716 R43.1@146.7,-70.716 148.369,-72.385 R38.1@155.829,-72.385
  Bottom Layer, Bottom w0.381: R44.2@145.542,-70.038 145.642,-70.038 146.102,-70.498 146.102,-71.762 146.304,-71.964 v3(146.304,-72.136)
NetC80_2: C80.2 T5.6 T5.10 | length 5.1
  Top Layer, Top w0.381: T5.10@138.938,-69.662 138.938,-70.107 139.57,-70.739 139.57,-71.062 139.88,-71.372 140.08,-71.172 142.027,-71.172 142.487,-70.712 C80.2@142.487,-70.612
NetC81_1: C81.1 R46.2 | length 2
  Top Layer, Top w1: R46.2@176.765,-68.699 176.866,-68.597 C81.1@176.866,-66.741
NetC81_2: C81.2 C93.1 C94.1 L38.2 Q3.1 R47.1 | length 27.9
  Top Layer, Top w1: Q3.1@170.076,-63.953 172.392,-63.953 ; C94.1@174.108,-46.613 174.124,-46.629 C93.1@176.257,-46.629 176.048,-46.837 L38.2@176.048,-53.491 176.048,-56.589 R47.1@172.392,-60.246 172.392,-63.953 ; C81.2@176.866,-63.942 172.392,-63.953
NetC86_1: C86.1 C87.2 C89.2 L35.2 | length 8.1
  Top Layer, Top w0.23: C87.2@20.764,-55.431 20.764,-51.298 22.804,-51.298 22.809,-51.303 22.809,-49.511 L35.2@22.697,-49.398
NetC86_2: C86.2 C88.2 L34.2 U4.7 | length 23.6
  Top Layer, Top w0.381: C86.2@19.939,-46.881 22.007,-46.881 22.181,-46.707 22.306,-46.707 22.716,-46.297 22.675,-46.256 C88.2@22.675,-44.268 22.675,-42.984 28.194,-37.465 35.179,-37.465 35.855,-36.789 U4.7@35.855,-35.289
NetC87_1: C87.1 C90.2 L36.2 U15.7 | length 12.2
  Top Layer, Top w0.23: C87.1@20.764,-60.424 20.764,-58.974 22.875,-58.974 L36.2@22.875,-59.558 22.875,-61.422 C90.2@22.833,-61.463
  Top Layer, Top w0.381: C90.2@22.833,-61.463 22.833,-61.922 24.158,-63.246 25.146,-63.246 26.289,-64.389 U15.7@26.289,-65.614
NetC91_1: C91.1 C92.1 C111.2 L37.1 Q1.1 R48.2 | length 26.3
  Top Layer, Top w1: C111.2@157.229,-61.468 159.306,-61.468 ; C92.1@157.533,-46.408 155.28,-46.408 C91.1@155.219,-46.346 155.219,-53.152 L37.1@155.562,-53.496 155.562,-56.627 R48.2@159.306,-60.371 159.306,-61.468 ; Q1.1@161.852,-63.993 159.306,-63.993 159.306,-61.468
NetC91_2: C91.2 C92.2 T3.4 T4.1 T4.3 | length 14.2
  Top Layer, Top w0.381: T3.4@155.929,-41.302 T3.4@155.956,-41.275
  Top Layer, Top w1: C91.2@155.219,-43.546 C91.2@155.25,-43.577 ; C91.2@155.929,-43.18 T3.4@155.929,-41.302 ; C92.2@157.502,-43.577 C92.2@157.533,-43.608
  Top Layer, Top w1.5: C91.2@155.25,-43.577 C92.2@157.502,-43.577
  Top Layer, Top w2: T4.1@153.289,-36.322 T4.3@156.464,-36.322
  Top Layer, Top w2.54: T4.1@153.035,-36.576 153.035,-40.636 154.944,-42.545
NetC93_2: C93.2 C94.2 T3.1 T4.2 T4.4 | length 16.8
  Top Layer, Top w0.381: C94.2@173.736,-43.441 C94.2@174.108,-43.813
  Top Layer, Top w1: T3.1@173.609,-41.529 T3.1@173.609,-41.275 ; C94.2@173.736,-43.441 T3.1@173.736,-41.275 ; C93.2@176.241,-43.813 C93.2@176.257,-43.829
  Top Layer, Top w1.5: C94.2@174.108,-43.813 C93.2@176.241,-43.813
  Top Layer, Top w2: T4.2@161.925,-36.322 T4.4@164.338,-36.322
  Top Layer, Top w2.54: T4.4@165.33,-37.314 167.927,-39.911 170.721,-39.911 172.735,-41.925
NetC101_1: C101.1 C102.2 C107.2 L40.2 L41.1 | length 8.5
  Top Layer, Top w0.381: C102.2@17.653,-22.926 15.496,-22.926 L41.1@15.43,-22.86 L40.2@15.43,-21.068 17.651,-21.068 C101.1@17.653,-21.07 19.406,-21.07 C107.2@19.739,-21.402
NetC101_2: C101.2 C104.2 L40.1 U12.8 | length 9.6
  Top Layer, Top w0.5: U12.8@11.008,-20.259 11.008,-19.759 11.118,-19.649 14.079,-19.649 14.361,-19.367 L40.1@15.43,-19.367 15.529,-19.269 17.554,-19.269 C101.2@17.653,-19.17 19.543,-19.17 C104.2@19.805,-19.431
NetC102_1: C102.1 C103.2 C108.2 L41.2 L42.1 | length 8.5
  Top Layer, Top w0.381: L41.2@15.43,-24.56 15.43,-26.352 15.433,-26.355 C103.2@17.651,-26.355 19.744,-26.355 C108.2@19.805,-26.416
  Top Layer, Top w0.5: L41.2@15.43,-24.56 15.563,-24.693 17.52,-24.693 C102.1@17.653,-24.826
NetC103_1: C103.1 C110.2 L42.2 U11.8 | length 12.3
  Top Layer, Top w0.5: U11.8@9.439,-26.604 9.439,-28.235 9.844,-28.64 15.048,-28.64 L42.2@15.533,-28.155 15.583,-28.205 17.601,-28.205 C103.1@17.651,-28.255 19.612,-28.255 C110.2@19.678,-28.321
NetC111_1: C111.1 R32.2 | length 4.2
  Top Layer, Top w1: C111.1@154.429,-61.468 154.813,-61.852 154.813,-65.19 154.967,-65.344 R32.2@155.067,-65.344
NetC112_1: C112.1 Q4.1 | length 2.1
  Top Layer, Top w1: Q4.1@55.419,-6.176 55.419,-6.201 56.446,-7.228 56.873,-7.228 C112.1@57.023,-7.378
NetC112_2: C112.2 U8.8 | length 9
  Top Layer, Top w0.5: U8.8@56.83,-15.834 58.334,-15.834 58.801,-15.367 58.801,-11.056 57.658,-9.913 57.658,-9.813 57.123,-9.278 C112.2@57.023,-9.278
NetC113_1: C113.1 D1.1 R49.1 | length 4.8
  Top Layer, Top w0.23: C113.1@128.132,-15.604 130.071,-15.604 R49.1@130.078,-15.611
  Top Layer, Top w1: D1.1@125.603,-16.377 127.359,-16.377 C113.1@128.132,-15.604
NetC114_1: C114.1 D18.1 R27.1 | length 7.4
  Bottom Layer, Bottom w0.381: D18.1@141.478,-58.423 146.543,-58.423 C114.1@146.812,-58.154 R27.1@146.812,-60.137
NetC116_1: C116.1 D23.1 R44.1 | length 13.1
  Bottom Layer, Bottom w0.381: D23.1@138.303,-58.296 138.303,-59.436 144.726,-65.859 145.095,-65.859 145.542,-66.306 R44.1@145.542,-68.138
NetC117_2: C117.2 D3.1 R50.1 | length 4.6
  Top Layer, Top w0.23: R50.1@115.196,-17.542 115.196,-15.573 C117.2@115.236,-15.533
  Top Layer, Top w1: C117.2@115.236,-15.533 115.236,-15.649 116.169,-15.649 116.846,-16.325 117.452,-16.325
NetC120_1: C120.1 U10.8 | length 4.9
  Top Layer, Top w0.23: U10.8@50.104,-13.884 U10.8@50.165,-13.823
  Top Layer, Top w0.5: U10.8@50.165,-13.823 C120.1@50.165,-9.005
NetC120_2: C120.2 L46.2 Q4.3 | length 7.5
  Top Layer, Top w0.5: Q4.3@52.073,-5.831 v3@52.073,-4.448
  Top Layer, Top w1: C120.2@50.165,-7.105 50.265,-7.105 51.343,-6.027 Q4.3@51.944,-6.027 ; v3(52.07,-4.445) v3@52.073,-4.448
  Bottom Layer, Bottom w1: v3(52.07,-4.445) 52.073,-4.448 52.073,-8.237 L46.2@52.157,-8.322
NetC121_2: C121.2 C122.2 C127.2 C133.2 R39.1 U6.2 U6.4 | length 20.3
  Bottom Layer, Bottom w0.23: U6.4@35.246,-20.68 C133.2@44.86,-20.68 ; C133.2@44.751,-20.981 44.751,-20.946 C133.2@44.765,-20.932 C133.2@44.86,-20.68 ; C121.2@47.416,-20.957 47.586,-20.957 C121.2@47.586,-20.68 ; C122.2@49.842,-19.363 C122.2@49.842,-19.324 ; C127.2@51.216,-17.943 C127.2@51.222,-17.943 ; R39.1@52.111,-15.892 52.111,-17.054 C127.2@51.222,-17.943 ; C133.2@44.86,-20.68 C121.2@47.586,-20.68 ; C121.2@47.586,-20.68 48.485,-20.68 C122.2@49.842,-19.324 ; C122.2@49.842,-19.324 C127.2@51.222,-17.943
NetC124_2: C124.2 L44.2 L45.1 | length 21.5
  Top Layer, Top w1.83: C124.2@140.74,-13.711 132.988,-13.711 L45.1@132.988,-13.659 L44.2@146.654,-13.665
NetC126_2: C126.2 C136.2 Q2.3 U5.3 | length 7
  Top Layer, Top w0.23: Q2.3@119.577,-25.77 119.843,-25.503 C126.2@121.404,-25.503 ; U5.3@124.617,-25.77 U5.3@124.624,-25.763
  Top Layer, Top w1: Q2.3@119.577,-25.77 121.404,-25.77 122.809,-25.77 123.063,-25.77 U5.3@124.617,-25.77
NetC128_1: C128.1 C137.1 R28.2 R29.2 R52.1 U5.2 U5.4 | length 37.1
  Top Layer, Top w0.95: U5.2@124.624,-23.463 126.199,-23.463
  Top Layer, Top w1: 126.199,-23.463 U5.4@130.424,-23.463 ; R52.1@126.212,-19.239 130.424,-23.451 U5.4@130.424,-23.463 ; R29.2@128.905,-40.96 131.445,-40.96 ; R28.2@135.89,-40.96 131.445,-40.96 ; U5.4@130.424,-23.463 130.67,-23.709 131.421,-23.709 131.421,-27.178 131.421,-28.674 131.443,-28.674 131.444,-35.56 131.444,-40.959 131.445,-40.96
NetC129_1: C129.1 C130.2 Q5.3 U6.3 | length 7.3
  Bottom Layer, Bottom w0.381: C129.1@41.815,-28.638 C129.1@41.815,-28.524
  Bottom Layer, Bottom w0.95: 41.046,-23.955 U6.3@41.046,-22.98
  Bottom Layer, Bottom w1: C129.1@40.92,-28.522 C130.2@40.92,-25.387 41.046,-25.261 41.046,-23.955 ; C129.1@41.815,-28.524 Q5.3@43.401,-28.524
NetD1_2: D1.2 R56.1 TSWR.3 | length 5.2
  Top Layer, Top w1: D1.2@125.452,-13.577 125.452,-10.653 TSWR.3@125.466,-10.653
  Bottom Layer, Bottom w1: R56.1@123.227,-10.525 125.339,-10.525 TSWR.3@125.466,-10.653
NetD3_2: D3.2 R55.1 TSWR.4 TSWR.6 | length 13.5
  Top Layer, Top w1: TSWR.6@111.466,-8.653 TSWR.4@111.466,-10.653 114.579,-10.653 117.452,-13.525
  Bottom Layer, Bottom w1: TSWR.6@111.466,-8.653 TSWR.4@111.466,-10.653 111.538,-10.725 R55.1@113.762,-10.725
NetD18_2: D18.2 R30.2 | length 6
  Bottom Layer, Bottom w0.381: R30.2@138.43,-50.257 141.478,-53.305 D18.2@141.478,-54.991
NetD23_2: D23.2 R40.2 | length 9
  Bottom Layer, Bottom w0.381: R40.2@131.445,-50.292 136.649,-55.496 D23.2@138.303,-55.496
NetJ1_5: J1.5 K1.6 | length 16
  Top Layer, Top w1.83: J1.5@77.597,-4.572 77.597,-17.78 77.801,-17.984 80.215,-17.984 K1.6@80.265,-18.034
NetJ3_3: J3.3 R3.1 | length 6.2
  Top Layer, Top w0.23: R3.1@107.756,-67.631 107.315,-68.072 107.315,-71.882 108.518,-73.085 J3.3@108.518,-73.158
NetJ3_4: J3.4 R7.1 | length 7.2
  Top Layer, Top w0.23: J3.4@108.518,-70.618 108.966,-70.17 108.966,-63.881 R7.1@109.153,-63.694
NetJ3_5: J3.5 R8.1 | length 6.2
  Top Layer, Top w0.23: R8.1@110.169,-67.631 109.855,-67.945 109.855,-71.955 J3.5@111.058,-73.158
NetJ3_6: J3.6 R9.1 | length 7.2
  Top Layer, Top w0.23: J3.6@111.058,-70.618 111.379,-70.297 111.379,-63.973 111.658,-63.694 R9.1@111.693,-63.694
NetJ3_7: J3.7 R10.1 | length 6.2
  Top Layer, Top w0.23: R10.1@112.709,-67.631 112.395,-67.945 112.395,-71.955 J3.7@113.598,-73.158
NetJ3_8: J3.8 R11.1 | length 7.2
  Top Layer, Top w0.23: J3.8@113.598,-70.618 113.598,-70.23 114.233,-69.595 R11.1@114.233,-63.694
NetJ3_9: J3.9 R12.1 | length 6.5
  Top Layer, Top w0.23: R12.1@115.63,-67.631 115.53,-67.631 114.935,-68.226 114.935,-72.082 J3.9@116.138,-73.285
NetJ5_5: J5.5 K1.3 | length 15.4
  Top Layer, Top w1.83: K1.3@88.265,-18.034 89.647,-18.034 91.059,-16.622 J5.5@91.059,-4.572
NetL39_1: L39.1 Q1.3 R34.2 | length 16
  Top Layer, Top w1: R34.2@148.844,-67.948 148.944,-67.948 149.244,-68.248 149.244,-69.107 150.908,-70.771 154.996,-70.771 L39.1@155.067,-70.7 160.246,-70.7 161.852,-69.094 Q1.3@161.852,-68.493
NetL39_2: L39.2 R32.1 | length 1.8
  Top Layer, Top w1: L39.2@155.067,-69 R32.1@155.067,-67.244
NetL46_1: L46.1 R39.2 | length 1.8
  Bottom Layer, Bottom w0.23: R39.2@52.111,-13.092 52.157,-13.045 L46.1@52.157,-11.322
NetL47_1: L47.1 Q3.3 R38.2 | length 20.2
  Top Layer, Top w1: R38.2@158.75,-72.39 167.88,-72.385 168.978,-71.287 ; Q3.3@170.076,-68.453 170.076,-70.189 168.978,-71.287 ; L47.1@174.481,-72.996 170.688,-72.996 168.978,-71.287
NetL47_2: L47.2 R46.1 | length 2.6
  Top Layer, Top w0.381: L47.2@176.181,-72.996 L47.2@176.53,-72.648 ; R46.1@176.53,-70.834 R46.1@176.765,-70.599
  Top Layer, Top w1: L47.2@176.53,-72.648 R46.1@176.53,-70.834
NetL48_2: L48.2 T5.4 T5.11 | length 5.6
  Top Layer, Top w0.381: L48.2@132.803,-70.104 135.89,-70.104 ; T5.4@135.268,-71.372 135.58,-71.372 135.89,-71.062 135.89,-70.104 ; T5.11@136.398,-69.662 136.398,-69.914 136.208,-70.104 135.89,-70.104
NetQ2_1: Q2.1 Q7.3 R41.1 | length 7
  Top Layer, Top w0.23: Q7.3@111.971,-25.019 115.316,-25.019 ; R41.1@115.259,-26.632 115.259,-25.076 115.316,-25.019 ; Q2.1@117.039,-24.606 116.835,-24.811 116.835,-25.019 115.316,-25.019
NetQ5_1: Q5.1 Q6.3 R57.1 | length 6.1
  Bottom Layer, Bottom w0.381: R57.1@45.913,-25.273 45.931,-25.291 Q5.1@45.931,-27.625 48.677,-27.625 49.246,-28.194 Q6.3@49.446,-28.194
NetQ6_1: Q6.1 R31.1 R33.2 | length 4.4
  Bottom Layer, Bottom w0.381: Q6.1@51.646,-27.244 53.748,-27.244 R33.2@53.848,-27.344 R31.1@56.007,-27.344
NetQ7_1: Q7.1 R37.1 R45.2 | length 5.3
  Top Layer, Top w0.23: R37.1@107.657,-24.13 107.718,-24.069 Q7.1@109.771,-24.069 109.971,-24.069 111.078,-22.962 111.695,-22.962 112.18,-22.477 R45.2@112.18,-22.352
NetQ8_1: Q8.1 R65.1 R70.2 | length 5.1
  Top Layer, Top w0.381: Q8.1@108.139,-37.476 108.139,-39.688 107.73,-40.098 R65.1@107.692,-40.098 R70.2@109.978,-40.098
NetR28_1: R28.1 R30.3 | length 4.9
  Top Layer, Top w0.381: R28.1@135.89,-42.86 135.93,-42.9 R30.3@135.93,-47.757
NetR29_1: R29.1 R40.3 | length 4.9
  Top Layer, Top w0.381: R29.1@128.905,-42.86 128.945,-42.9 R40.3@128.945,-47.792
NetR52_2: R52.2 R53.1 U5.1 | length 4.1
  Top Layer, Top w0.23: R53.1@122.258,-19.207 124.279,-19.207 124.312,-19.239 124.624,-19.551 U5.1@124.624,-21.163
NetR71_2: R71.2 U1.15 | length 19.9
  Top Layer, Top w0.23: R71.2@77.177,-32.385 78.613,-32.385 90.297,-44.069 90.297,-45.882 U1.15@90.364,-45.949
NetR72_2: R72.2 U1.1 | length 5.5
  Top Layer, Top w0.23: U1.1@89.094,-51.199 89.094,-56.621 R72.2@89.154,-56.681
NetR73_2: R73.2 U1.2 | length 2.1
  Top Layer, Top w0.23: U1.2@90.364,-51.199 90.364,-53.192 R73.2@90.424,-53.252
NetR74_2: R74.2 U1.3 | length 5.4
  Top Layer, Top w0.23: U1.3@91.634,-51.199 91.634,-56.494 R74.2@91.694,-56.554
NetR75_2: R75.2 U1.4 | length 2
  Top Layer, Top w0.23: U1.4@92.904,-51.199 92.904,-53.065 R75.2@92.964,-53.125
NetR76_2: R76.2 U1.5 | length 5.4
  Top Layer, Top w0.23: U1.5@94.174,-51.199 94.174,-56.494 R76.2@94.234,-56.554
NetR77_2: R77.2 U1.6 | length 2
  Top Layer, Top w0.23: U1.6@95.444,-51.199 95.444,-53.104 R77.2@95.504,-53.164
NetR78_2: R78.2 U7.15 | length 127.6
  Top Layer, Top w0.23: v4(13.589,-6.096) R78.2@14.771,-6.096
  Bottom Layer, Bottom w0.23: v4(13.589,-6.096) 13.589,-5.715 13.074,-5.2 13.074,-3.544 15.729,-0.889 64.643,-0.889 69.977,-6.223 69.977,-21.59 72.009,-23.622 86.614,-23.622 94.107,-31.115 96.393,-31.115 99.314,-34.036 99.314,-35.306 98.298,-36.322 91.948,-36.322 90.057,-38.213 U7.15@90.057,-40.09
NetR79_2: R79.2 U7.1 | length 90.4
  Top Layer, Top w0.23: R79.2@26.123,-5.715 v4(27.305,-5.715)
  Bottom Layer, Bottom w0.23: v4(27.305,-5.715) 27.305,-4.826 29.477,-2.654 63.487,-2.654 67.437,-6.604 67.437,-22.86 70.739,-26.162 85.471,-26.162 88.787,-29.478 U7.1@88.787,-34.84
NetR80_2: R80.2 U7.2 | length 90.7
  Top Layer, Top w0.23: R80.2@25.615,-3.429 25.742,-3.302 v4(26.924,-3.302)
  Bottom Layer, Bottom w0.23: v4(26.924,-3.302) 27.891,-2.335 63.803,-2.335 67.945,-6.477 67.945,-22.733 70.77,-25.558 85.502,-25.558 90.057,-30.113 U7.2@90.057,-34.84
NetR81_2: R81.2 U7.3 | length 96.3
  Top Layer, Top w0.23: R81.2@20.955,-1.651 21.209,-1.905 21.971,-1.905 v4(22.352,-2.286)
  Bottom Layer, Bottom w0.23: v4(22.352,-2.286) 22.792,-1.846 63.949,-1.846 68.453,-6.35 68.453,-22.479 70.993,-25.019 85.598,-25.019 91.327,-30.748 U7.3@91.327,-34.84